# EAGLE board board_final (EAGLE 9.6.2)
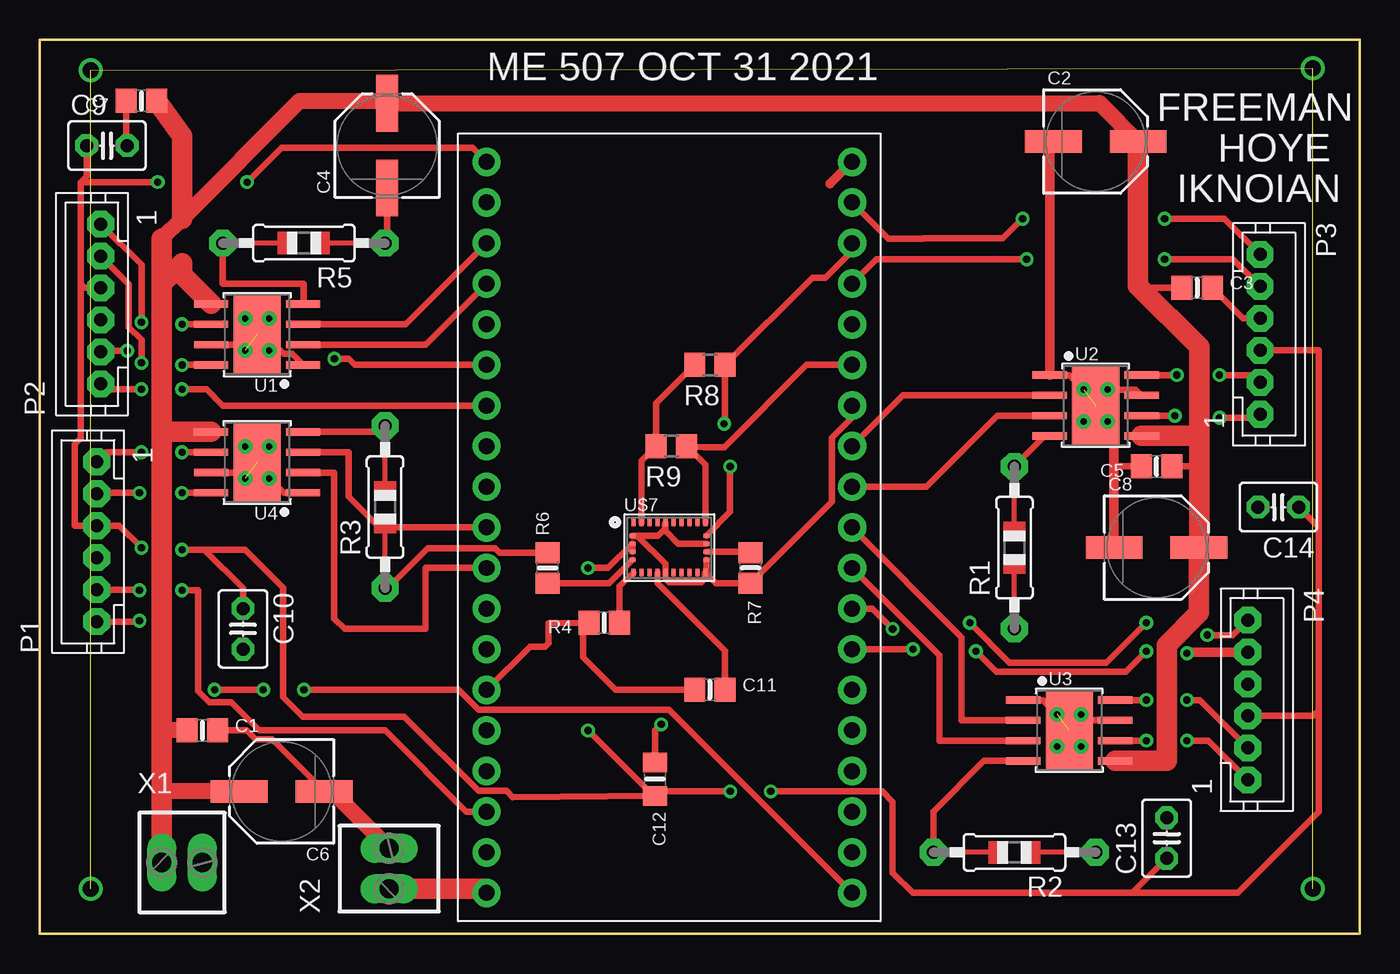
[diagram p0: board, top side]
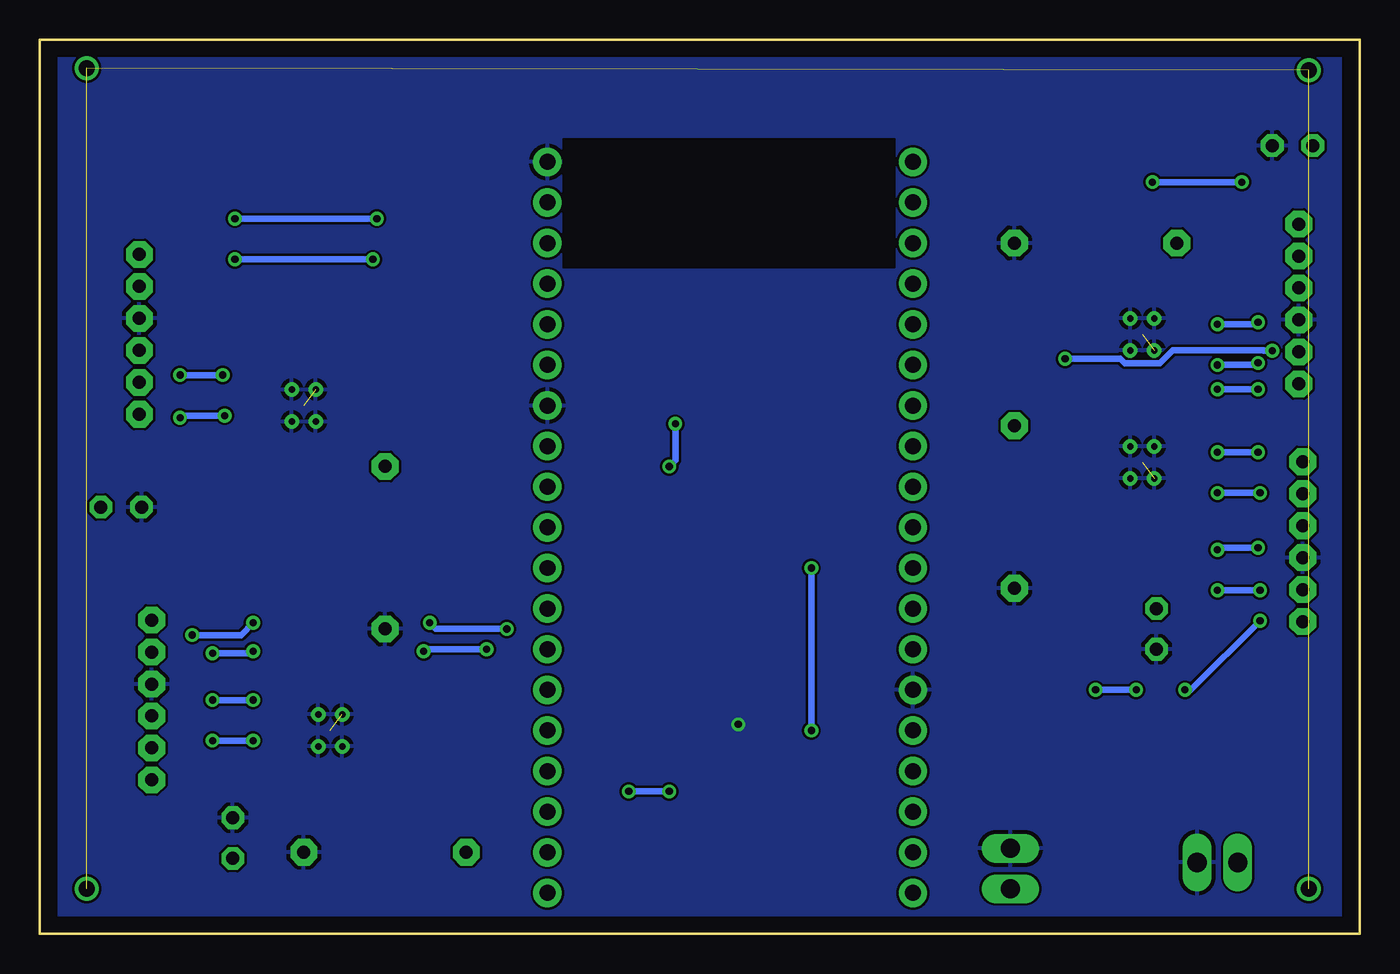
[diagram p1: board, bottom side, seen from below]

Size 82.55 x 55.88 mm. Coordinates in mm from the lower left corner, seen from the top.
Outline: 0,55.88 82.55,55.88 82.55,0 0,0 0,55.88
Copper layers (1*16): Top 0.035mm / dielectric 1.5mm / Bottom 0.035mm
Design rules "default": minimum track width 6mil, minimum drill 0.35mm, track to track 6mil, track to pad 6mil, pad to pad 6mil, via to via 6mil, smd to smd 6mil, copper to edge 40mil, drill to drill 6mil, minimum pad ring 10mil, minimum via ring 8mil, stop-mask expansion 4mil, vias tented up to drill 0mil, thermal gap 10mil

## Footprints (pad centres in the part's own frame; a part is rotated, then mirrored left to right if it is on the bottom)
0805-NO = smd 1.3 x 1.5: 1 -0.95,0; 2 0.95,0
PANASONIC_D = smd 3.556 x 1.4: + 2.654,0; - -2.654,0
C025-030X050 = drill 0.813 pad 1.422 octagon: 1 -1.27,0; 2 1.27,0
0805_10MGAP = smd 1.2 x 1.5: 1 -1.05,0; 2 1.05,0
JST-PH6 = drill 0.813 pad 1.676 octagon: 1 5,0; 2 3,0; 3 1,0; 4 -1,0; 5 -3,0; 6 -5,0
0805-THM = drill 0.813 pad 1.676 octagon: 1 -5.08,0; 2 5.08,0
R0805 = smd 1.3 x 1.5: 1 -0.95,0; 2 0.95,0
HSOP8 = smd 0.45 x 2.15: 1 -1.905,-2.875; 2 -0.635,-2.875; 3 0.635,-2.875; 4 1.905,-2.875; 5 1.905,2.875; 6 0.635,2.875; 7 -0.635,2.875; 8 -1.905,2.875 | smd 4.9 x 2.95: GND 0,0 | drill 0.4: P$1 -1,0.75; P$2 -1,-0.75; P$3 1,-0.75; P$4 1,0.75
KEEYEES_ESP32 = drill 1 pad 1.778: P1 -11.43,21.59; P2 -11.43,19.05; P3 -11.43,16.51; P4 -11.43,13.97; P5 -11.43,11.43; P6 -11.43,8.89; P7 -11.43,6.35; P8 -11.43,3.81; P9 -11.43,1.27; P10 -11.43,-1.27; P11 -11.43,-3.81; P12 -11.43,-6.35; P13 -11.43,-8.89; P14 -11.43,-11.43; P15 -11.43,-13.97; P16 -11.43,-16.51; P17 -11.43,-19.05; P18 -11.43,-21.59; P19 -11.43,-24.13; P20 11.43,-24.13; P21 11.43,-21.59; P22 11.43,-19.05; P23 11.43,-16.51; P24 11.43,-13.97; P25 11.43,-11.43; P26 11.43,-8.89; P27 11.43,-6.35; P28 11.43,-3.81; P29 11.43,-1.27; P30 11.43,1.27; P31 11.43,3.81; P32 11.43,6.35; P33 11.43,8.89; P34 11.43,11.43; P35 11.43,13.97; P36 11.43,16.51; P37 11.43,19.05; P38 11.43,21.59
BNO055 = smd 0.25 x 0.475: 1 -2.25,1.562; 6 -2.25,-1.562; 7 -1.75,-1.562; 8 -1.25,-1.562; 9 -0.75,-1.562; 10 -0.25,-1.562; 11 0.25,-1.562; 12 0.75,-1.562; 13 1.25,-1.562; 14 1.75,-1.562; 15 2.25,-1.562; 20 2.25,1.562; 21 1.75,1.562; 22 1.25,1.562; 23 0.75,1.562; 24 0.25,1.562; 25 -0.25,1.562; 26 -0.75,1.562; 27 -1.25,1.562; 28 -1.75,1.562 | smd 0.375 x 0.25: 2 -2.312,0.75; 3 -2.312,0.25; 4 -2.312,-0.25; 5 -2.312,-0.75; 16 2.312,-0.75; 17 2.312,-0.25; 18 2.312,0.25; 19 2.312,0.75
2POL254 = drill 1.2 long: 1 -1.27,0; 2 1.27,0

## Placement (x,y rotation side)
C1  0.1uF/50V  [0805-NO]  10.16,12.7 0 top
C2  22uF/63V  [PANASONIC_D]  66.04,49.53 0 top
C3  0.1uF/50V  [0805-NO]  72.39,40.39 0 top
C4  22uF/63V  [PANASONIC_D]  21.72,49.28 90 top
C5  0.1uF/50V  [0805-NO]  69.85,29.21 180 top
C6  22uF/63V  [PANASONIC_D]  15.11,8.89 180 top
C7  0.1uF/50V  [0805-NO]  6.35,52.07 180 top
C8  22uF/63V  [PANASONIC_D]  69.85,24.13 0 top
C9  0.1uF  [C025-030X050]  4.19,49.28 0 top
C10  0.1uF  [C025-030X050]  12.7,19.05 270 top
C11  0.1uF  [0805-NO]  41.91,15.24 0 top
C12  0.1uF  [0805_10MGAP]  38.48,9.65 270 top
C13  0.1uF  [C025-030X050]  70.48,5.97 90 top
C14  0.1uF  [C025-030X050]  77.47,26.67 180 top
P1  [JST-PH6]  3.56,24.51 90 top
P2  [JST-PH6]  3.81,39.37 90 top
P3  [JST-PH6]  76.33,37.47 270 top
P4  [JST-PH6]  75.56,14.61 270 top
R1  30K  [0805-THM]  60.96,24.13 90 top
R2  30K  [0805-THM]  60.96,5.08 180 top
R3  30K  [0805-THM]  21.59,26.67 90 top
R4  10K  [0805-NO]  35.31,19.43 180 top
R5  30K  [0805-THM]  16.51,43.18 180 top
R6  10K  [0805-NO]  31.75,22.86 90 top
R7  10K  [0805-NO]  44.45,22.86 270 top
R8  4.7K  [R0805]  41.91,35.56 180 top
R9  4.7K  [R0805]  39.5,30.48 180 top
U1  DRV8871  [HSOP8]  13.59,37.47 90 top
U2  DRV8871  [HSOP8]  66.04,33.02 270 top
U3  DRV8871  [HSOP8]  64.39,12.7 270 top
U4  DRV8871  [HSOP8]  13.59,29.46 90 top
U$1  KEEYEES_ESP32  [KEEYEES_ESP32]  39.37,26.67 0 top
U$7  BNO055  [BNO055]  39.37,24.13 0 top
X1  [2POL254]  8.89,4.45 0 top
X2  [2POL254]  21.84,4.06 90 top

## Library data of the parts
C1-C8 C11 C12 R4 R6 R7 U1-U4 U$7 = microbuilder
C9 C10 C13 C14 R1-R3 R5 = adafruit
P1-P4 = jst-ph
R8 R9 = rcl; SPICEPREFIX: R
U$1 X1 X2 = ME507 (1)

## Nets
ESP_PWR: U$1.P19 X2.1
GND: C1.2 C2.- C3.2 C4.- C5.2 C6.- C7.2 C8.- C9.2 C10.2 C11.1 C12.1 C13.2 C14.2 P1.4 P2.4 P3.4 P4.4 R1.1 R2.1 R3.1 R4.2 R5.1 R6.2 R7.2 U1.1 U1.7 U1.GND U1.P$1 U1.P$2 U1.P$3 U1.P$4 U2.1 U2.7 U2.GND U2.P$1 U2.P$2 U2.P$3 U2.P$4 U3.1 U3.7 U3.GND U3.P$1 U3.P$2 U3.P$3 U3.P$4 U4.1 U4.7 U4.GND U4.P$1 U4.P$2 U4.P$3 U4.P$4 U$1.P14 U$1.P32 U$1.P38 U$7.2 U$7.10 U$7.15 U$7.16 U$7.18 U$7.25 X1.2 X2.2
I2CADDR_3V: R7.1 U$7.17
IMU_SCL: R8.1 U$1.P36 U$7.19
IMU_SDA: R9.1 U$1.P33 U$7.20
M1_IN1: U1.3 U$1.P3
M1_IN2: U1.2 U$1.P4
M1_NEG: P2.1 U1.6
M1_POS: P2.2 U1.8
M2_IN1: U4.3 U$1.P10
M2_IN2: U4.2 U$1.P11
M2_NEG: P1.1 U4.6
M2_POS: P1.2 U4.8
M3_IN1: U2.2 U$1.P31
M3_IN2: U2.3 U$1.P30
M3_NEG: P3.1 U2.6
M3_POS: P3.2 U2.8
M4_IN1: U3.2 U$1.P29
M4_IN2: U3.3 U$1.P28
M4_NEG: P4.2 U3.8
M4_POS: P4.1 U3.6
MOTOR_POWER: C1.1 C2.+ C3.1 C4.+ C5.1 C6.+ C7.1 C8.+ U1.5 U2.5 U3.5 U4.5 X1.1
N$1: R1.2 U2.4
N$2: R2.2 U3.4
N$3: R3.2 U4.4
N$4: R8.2 R9.2 U$7.28
N$5: U$1.P9
N$7: C11.2 U$7.9
N$9: R5.2 U1.4
PS0_3V: R4.1 U$7.6
PS1_3V: R6.1 U$7.5
SNSR_A_OUT: P2.5 U$1.P6
SNSR_A_OUT_2: P1.5 U$1.P17
SNSR_A_OUT_3: P3.5 U$1.P35
SNSR_A_OUT_4: P4.5 U$1.P26
SNSR_B_OUT: P2.6 U$1.P7
SNSR_B_OUT_2: P1.6 U$1.P20
SNSR_B_OUT_3: P3.6 U$1.P37
SNSR_B_OUT_4: P4.6 U$1.P27
SNSR_VCC: C9.1 C10.1 C12.2 C13.1 C14.1 P1.3 P2.3 P3.3 P4.3 U$1.P1 U$7.3 U$7.4

## Tracks (layer width: path | path; a pad name or v marks a point on that pad's centre or on a via)
ESP_PWR
  Top 1.27: U$1.P19 27.69,2.79 X2.1
GND  (via drill 0.45)  (4 unrouted)
  Top 0.152: 65.5,13.34 U3.P$1
  Top 0.406: U1.1 15.78,36.25 15.24,36.25 15.03,36.47 U1.P$2 | U1.7 12.47,36.83 U1.P$1 | U4.7 12.47,28.83 U4.P$1 | U4.1 15.24,27.56 U4.P$2 | U$1.P14 30.64,17.94 31.6,17.94 31.81,18.15 31.81,19.42 R4.2 33.98,19.05 33.98,17.26 36,15.24 C11.1 | R6.2 28.75,23.81 28.46,24.11 24.24,24.11 21.8,21.66 21.66,21.66 R3.1 | U$1.P32 50.8,32.24 49.55,31 49.55,27.01 45.35,22.8 45.34,22.8 R7.2 42.28,21.91 U$7.15 | U2.1 64.38,34.92 U2.P$2 | 63.16,49.31 C2.- | U3.1 62.73,14.61 U3.P$2 | U2.7 68.55,34.02 U2.P$1 | U$7.15 41.6,22.55 41.6,22.18 41.39,21.97 39.35,21.97 39.14,22.18 39.14,22.55 | 39.14,22.55 U$7.10 | U$7.18 39.93,24.38 39.12,25.18 U$7.25 39.1,25.67 39.1,25.31 38.67,24.88 U$7.2 37.08,24.86 37.39,24.86 39.14,23.11 39.14,22.55 | U$7.16 41.68,22.63 U$7.15 | v38.86,13.08 38.48,12.7 C12.1 | U3.7 65.5,13.34 | C3.2 75.26,38.47 P3.4 | C5.2 67.2,29.21 | C7.2 5.4,49.34 C9.2 | C1.2 12.93,12.7 13.48,12.14 14.52,12.14 C6.- | C4.- 21.72,43.31 R5.1
  Top 0.61: U2.1 63.16,49.31 | U$1.P38 49.42,46.88 | U2.GND 67.2,31.86 67.2,29.21 C8.-
  Top 1.016: C6.- 18.29,8.89 X2.2
  pour Bottom: 0,55.88 82.55,55.88 82.55,0 0,0
I2CADDR_3V
  Top 0.406: R7.1 44.38,23.88 U$7.17
IMU_SCL  (via drill 0.45)
  Top 0.406: U$1.P36 50.8,42.67 49.15,41.02 48.32,41.02 R8.1 42.86,31.94 v42.8,31.88 | U$7.19 43.18,26.38 v43.18,29.21
  Bottom 0.406: v42.8,31.88 42.8,29.59 v43.18,29.21
IMU_SDA
  Top 0.406: U$1.P33 47.94,35.56 42.81,30.42 41.53,30.42 R9.1 41.62,29.31 U$7.20
M1_IN1
  Top 0.406: U1.3 22.86,38.1 U$1.P3
M1_IN2
  Top 0.406: U1.2 24.13,36.83 U$1.P4
M1_NEG  (via drill 0.45)
  Top 0.406: v8.89,38.1 U1.6 | v6.35,38.23 6.35,41.83 P2.1
  Bottom 0.406: v6.35,38.23 6.48,38.1 v8.89,38.1
M1_POS  (via drill 0.45)
  Top 0.406: U1.8 v8.89,35.56 | P2.2 5.57,40.61 5.57,37.9 6.35,37.12 v6.35,35.69
  Bottom 0.406: v6.35,35.69 6.48,35.56 v8.89,35.56
M2_IN1
  Top 0.406: U4.3 19.3,30.1 19.3,27.3 21.21,25.4 U$1.P10
M2_IN2
  Top 0.406: U$1.P11 24.13,22.86 24.13,19.05 19.05,19.05 18.41,19.68 18.41,28.83 U4.2
M2_NEG  (via drill 0.45)
  Top 0.406: v8.89,30.1 U4.6 | v6.35,30.1 4.14,30.1 P1.1
  Bottom 0.406: v6.35,30.1 v8.89,30.1
M2_POS  (via drill 0.45)
  Top 0.406: v8.89,27.56 U4.8 | v6.22,27.56 3.6,27.56 P1.2
  Bottom 0.406: v6.22,27.56 v8.89,27.56
M3_IN1
  Top 0.406: U$1.P31 53.98,33.66 U2.2
M3_IN2
  Top 0.406: U2.3 59.91,32.38 55.46,27.94 U$1.P30
M3_NEG  (via drill 0.45)
  Top 0.406: U2.6 v70.99,32.38 | v73.79,32.26 76.12,32.26 P3.1
  Bottom 0.406: v70.99,32.38 73.66,32.38 v73.79,32.26
M3_POS  (via drill 0.45)
  Top 0.406: U2.8 v71.12,34.92 | v73.79,34.92 75.87,34.92 P3.2
  Bottom 0.406: v73.79,34.92 v71.12,34.92
M4_IN1
  Top 0.406: U3.2 57.66,13.34 57.66,18.54 U$1.P29
M4_IN2
  Top 0.406: U$1.P28 56.26,17.4 56.26,12.06 U3.3
M4_NEG  (via drill 0.45)
  Top 0.406: U3.8 v69.21,14.61 | v71.75,14.61 72.56,14.61 P4.2
  Bottom 0.406: v71.75,14.61 v69.21,14.61
M4_POS  (via drill 0.45)
  Top 0.406: v71.75,12.06 73.1,12.06 P4.1 | U3.6 v69.21,12.06
  Bottom 0.406: v71.75,12.06 v69.21,12.06
MOTOR_POWER
  Top 0.406: C3.1 68.83,40.39 68.69,40.53 | C5.1 72.52,29.21
  Top 1.016: C6.+ 7.62,8.89 | 7.62,43.43 8.89,44.7 16.26,52.07 21.58,52.07 C4.+ 66.29,51.93 C2.+ | C1.1 7.62,12.7
  Top 1.27: X1.1 7.62,8.89 7.62,12.7 7.62,31.37 | U4.5 7.62,31.37 | C2.+ 68.69,40.53 72.52,36.7 72.52,31.11 | 72.52,31.11 U2.5 | 72.52,31.11 72.52,29.21 72.52,24.14 C8.+ 72.5,20.05 70.48,18.03 70.48,10.79 U3.5 | 7.62,40.64 8.89,41.91 8.89,41.19 U1.5 | C7.1 8.89,49.85 8.89,44.7 | 7.62,43.43 7.62,40.64 | 7.62,31.37 7.62,40.64
MOUNT  (via drill 1)  (3 unrouted)
  other vias: 3.17,2.79 79.63,2.79 79.63,54.1 3.17,53.98
N$1
  Top 0.406: R1.2 62.87,31.11 U2.4
N$2
  Top 0.406: R2.2 55.88,7.62 59.05,10.79 U3.4
N$3
  Top 0.406: R3.2 21.21,31.37 U4.4
N$4
  Top 0.406: R8.2 38.55,33.15 R9.2 37.62,29.55 U$7.28
N$7
  Top 0.406: C11.2 42.86,17.67 38.62,21.91 U$7.9
N$9
  Top 0.406: U1.4 16.51,39.42 16.51,40.64 11.43,40.64 R5.2
PS0_3V
  Top 0.406: R4.1 36.26,21.7 U$7.6
PS1_3V
  Top 0.406: R6.1 35.59,21.91 U$7.5
RADIO
  cutout Bottom (rank 2): 29.08,49.66 49.78,49.66 49.78,41.66 29.08,41.66
SNSR_A_OUT  (via drill 0.45)
  Top 0.406: U$1.P6 19.69,35.56 19.3,35.94 v18.41,35.94 | P2.5 3.89,36.45 v5.46,36.45
  Bottom 0.406: v5.46,36.45 6,36.45 6.02,36.47 11.69,36.47 12.5,35.66 14.67,35.66 14.96,35.94 v18.41,35.94
SNSR_A_OUT_2  (via drill 0.45)
  Top 0.406: P1.5 6.17,21.51 v6.22,21.46 | v8.89,21.46 9.91,21.46 9.91,15.15 10.6,14.46 11.96,14.46 13.72,12.7 21.59,12.7 26.67,7.62 U$1.P17
  Bottom 0.406: v6.22,21.46 v8.89,21.46
SNSR_A_OUT_3  (via drill 0.45)
  Top 0.406: P3.5 74.63,42.16 v70.36,42.16 | v61.72,42.16 52.32,42.16 U$1.P35
  Bottom 0.406: v70.36,42.16 v61.72,42.16
SNSR_A_OUT_4  (via drill 0.45)
  Top 0.406: v69.21,17.65 67.94,16.38 59.82,16.38 v58.55,17.65 | U$1.P26 v54.61,17.78
  Top 0.61: v71.75,17.53 71.83,17.61 P4.5
  Bottom 0.406: v71.75,17.53 69.34,17.53 v69.21,17.65 | v54.61,17.78 58.42,17.78 v58.55,17.65
SNSR_B_OUT  (via drill 0.45)
  Top 0.406: v6.35,34.04 4.14,34.04 P2.6 | v8.89,34.04 10.41,34.04 11.43,33.02 U$1.P7
  Bottom 0.406: v6.35,34.04 v8.89,34.04
SNSR_B_OUT_2  (via drill 0.45)
  Top 0.406: v10.92,15.24 v13.97,15.24 | v6.22,19.56 6.18,19.51 P1.6 | v16.51,15.24 26.18,15.24 27.42,13.99 39.34,13.99 U$1.P20
  Bottom 0.406: v6.22,19.56 10.54,15.24 v10.92,15.24 | v13.97,15.24 v16.51,15.24
SNSR_B_OUT_3  (via drill 0.45)
  Top 0.406: P3.6 74.09,44.7 v70.36,44.7 | U$1.P37 53.09,43.43 55.24,43.43 55.28,43.47 60.24,43.47 v61.47,44.7
  Bottom 0.406: v70.36,44.7 v61.47,44.7
SNSR_B_OUT_4  (via drill 0.45)
  Top 0.406: P4.6 74.63,18.67 v73.02,18.67 | v58.17,19.43 60.66,16.94 66.73,16.94 v69.21,19.43 | U$1.P27 52.07,20.32 v53.34,19.05
  Bottom 0.406: v58.17,19.43 57.79,19.05 v53.34,19.05 | v73.02,18.67 69.98,18.67 v69.21,19.43
SNSR_VCC  (via drill 0.45)
  Top 0.406: v6.35,24.13 4.97,25.51 P1.3 2.17,25.51 2.16,25.53 2.16,30.61 2.54,30.99 2.54,40.64 | v7.37,46.99 2.54,46.99 | 2.54,46.99 2.54,40.64 | 2.54,40.64 2.81,40.37 P2.3 | v12.95,46.99 15.11,49.15 27.05,49.15 U$1.P1 | C12.2 29.57,8.53 29.19,8.91 27.42,8.91 22.77,13.57 16.44,13.57 15.22,14.79 15.22,21.61 12.83,24 10.29,24 | P4.3 79.64,13.61 80.01,13.97 | 80.01,25.4 80.01,36.45 79.99,36.47 P3.3 | 80.01,25.4 80.01,13.97 | 80.01,13.97 80.01,7.62 74.93,2.54 68.33,2.54 | C12.2 38.77,8.89 v43.18,8.89 | v45.72,8.89 52.7,8.89 53.34,8.26 53.34,3.81 54.61,2.54 68.33,2.54 | U$7.4 U$7.3 35.54,22.86 v34.29,22.86 | C12.2 38.39,8.6 v34.29,12.7 | v8.89,24 10.29,24 | 10.29,24 12.7,21.59 C10.1 | C13.1 68.33,2.54 | C14.1 80.01,25.4 | C9.1 2.92,47.37 2.54,46.99
  Bottom 0.406: v6.35,24.13 8.76,24.13 v8.89,24 | v34.29,22.86 v34.29,12.7 | v7.37,46.99 v12.95,46.99 | v43.18,8.89 v45.72,8.89

## Text on the board
tNames: ME 507 OCT 31 2021 | FREEMAN | HOYE | IKNOIAN